# EAGLE board fins (EAGLE 7.3.0)
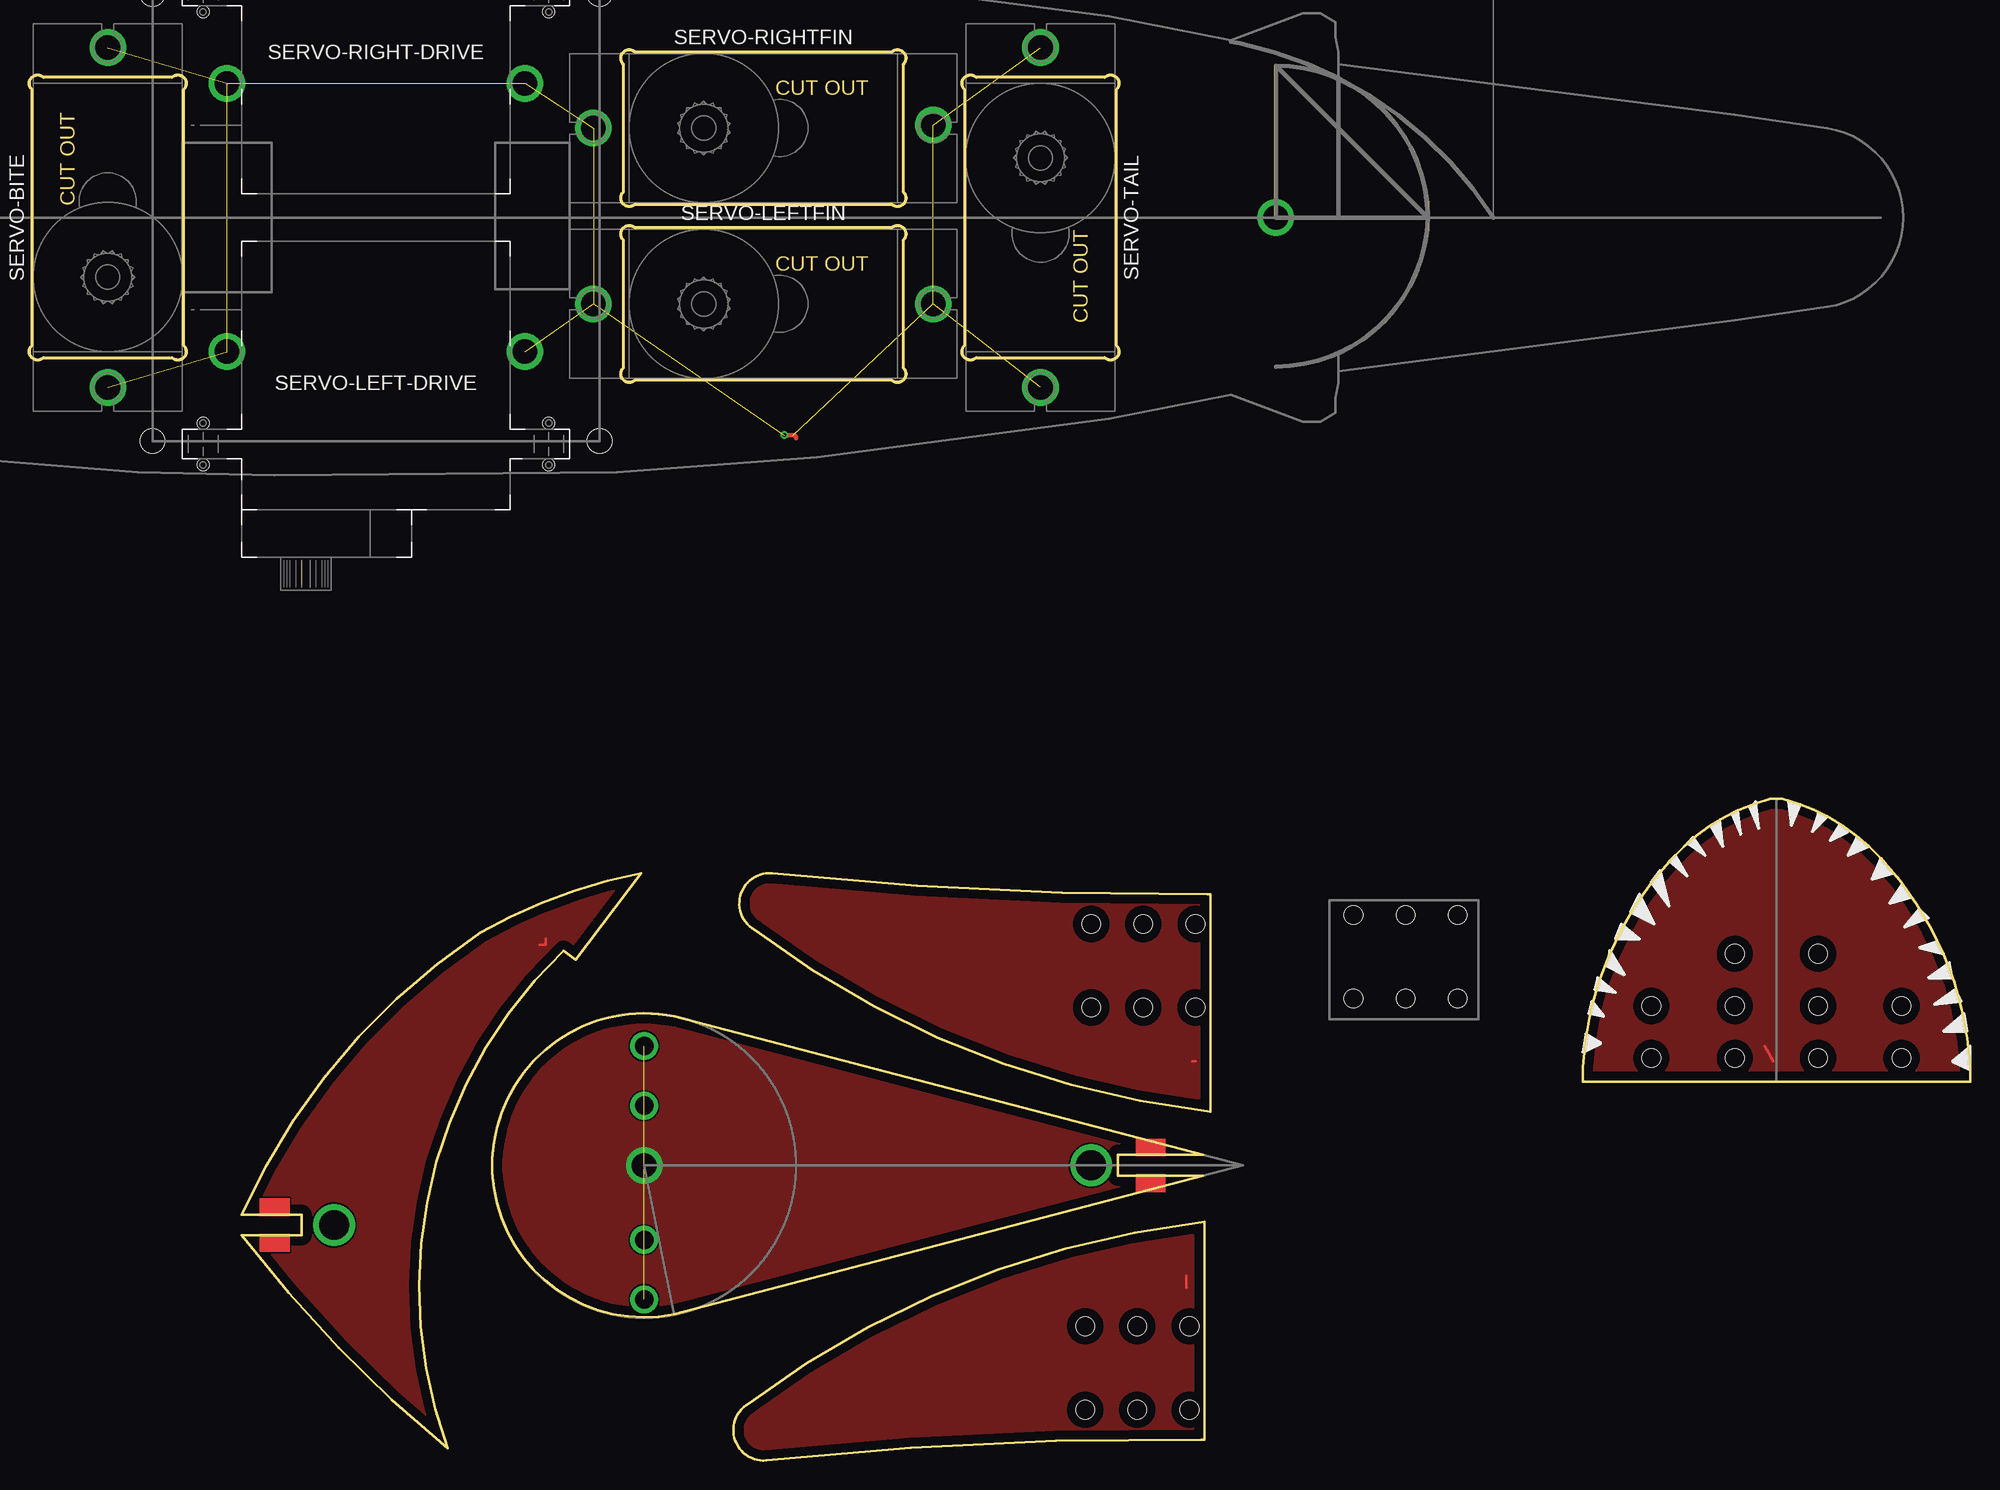
[diagram p0: board, top side]
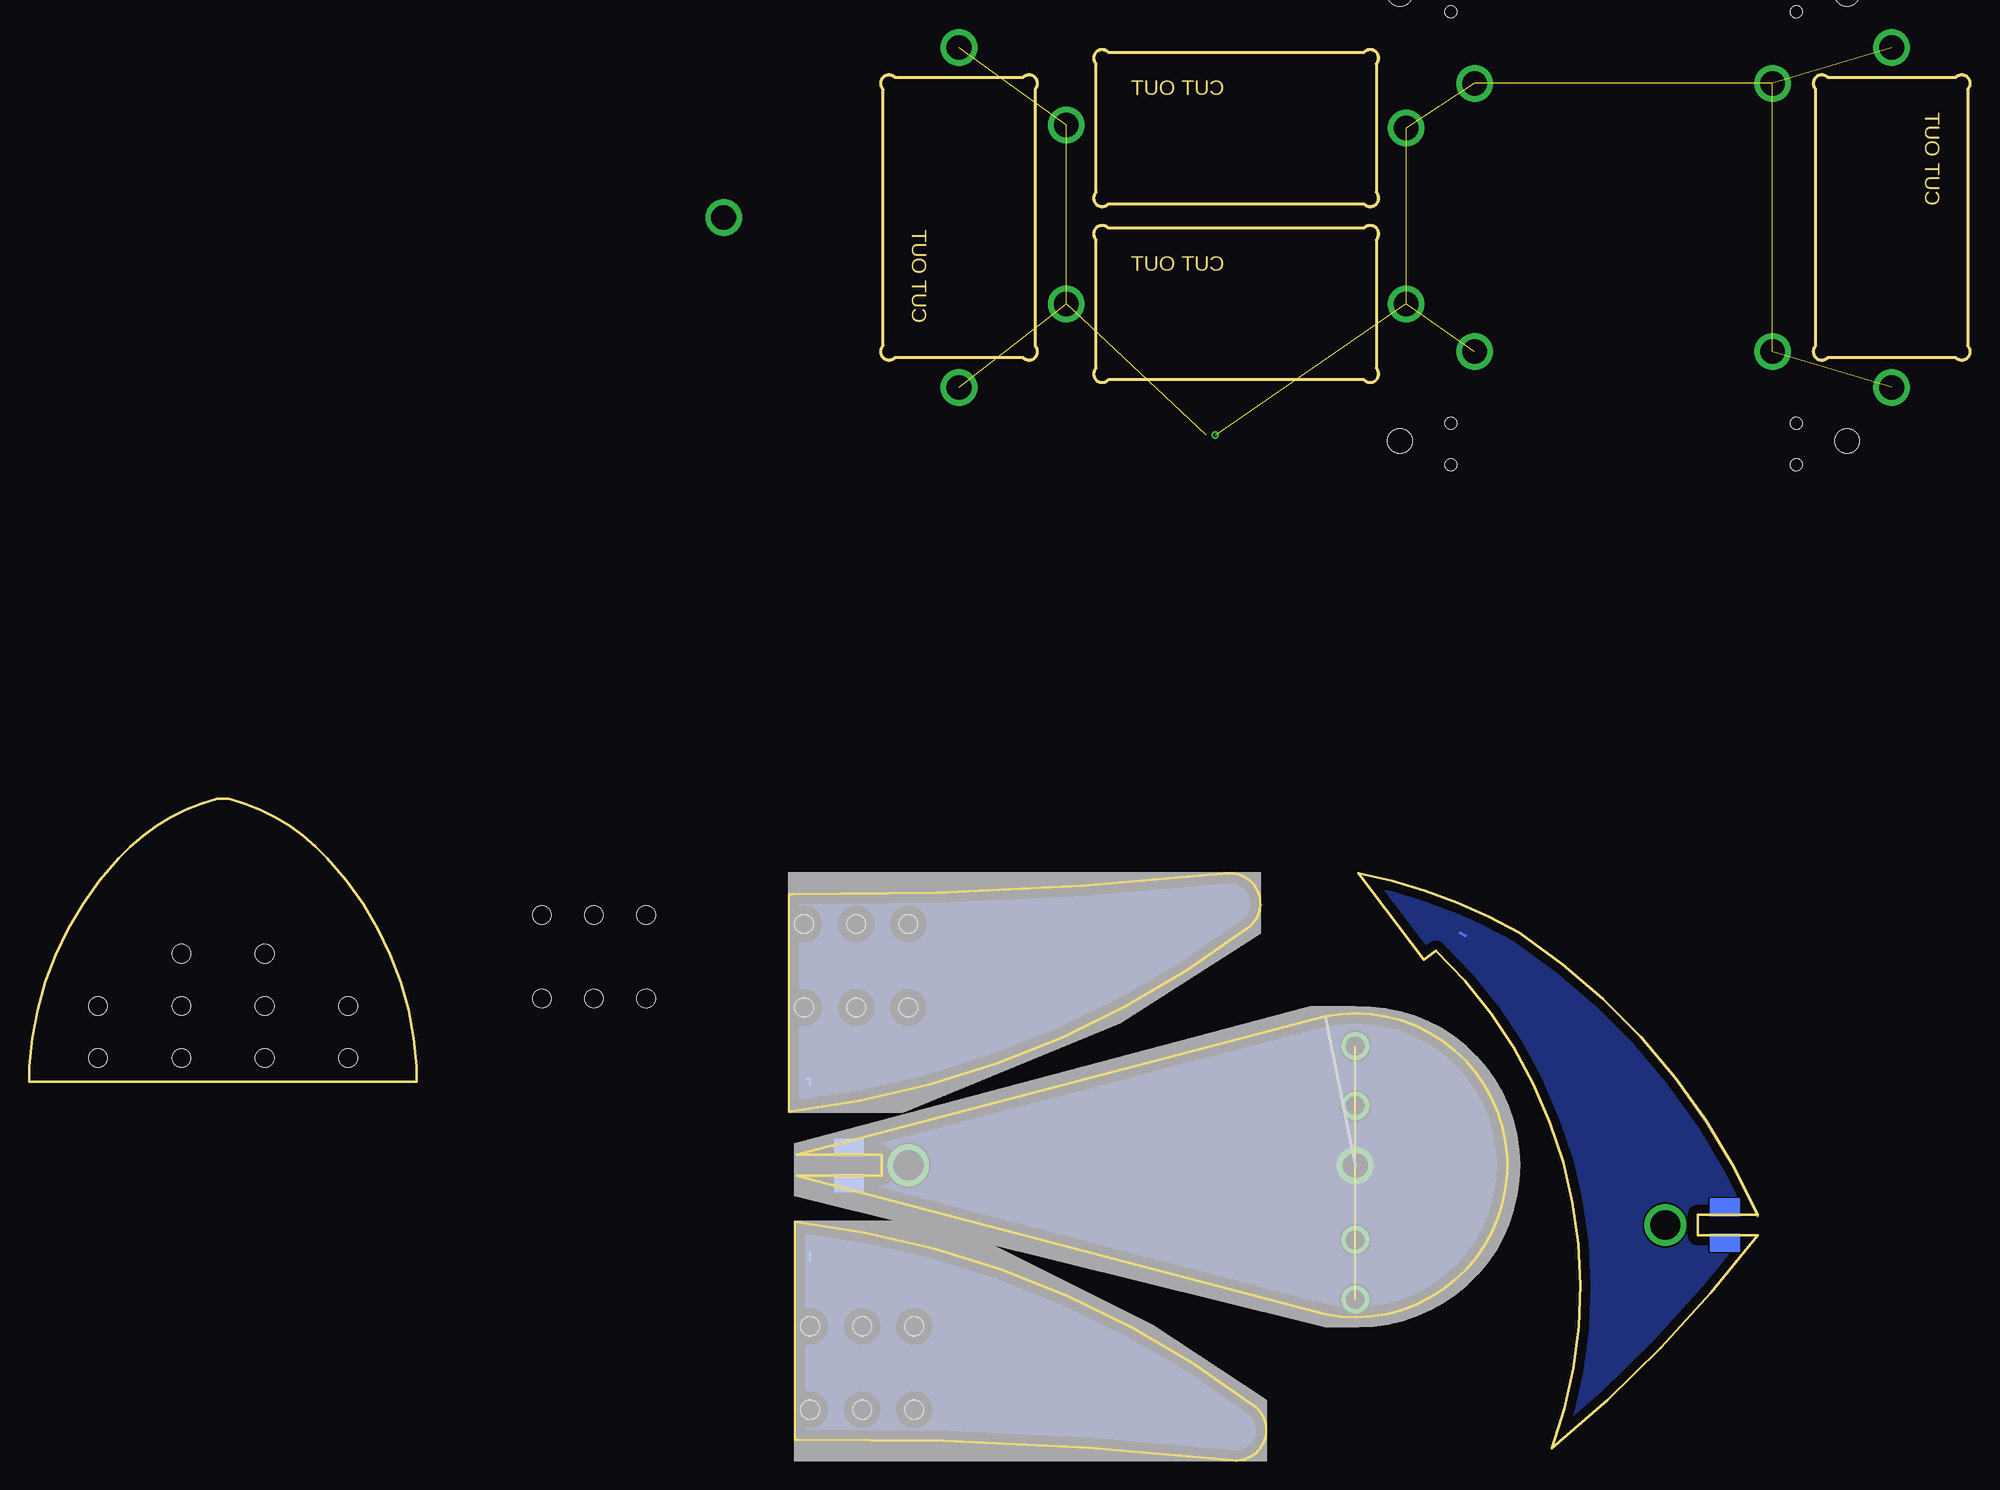
[diagram p1: board, bottom side, seen from below]

Size 165.44 x 120.23 mm. Coordinates in mm from the lower left corner, seen from the top.
Outline: 100.16,20.33 100.16,1.79 99.91,1.79 arc7 62.82,0.01 arc-155 61.3,4.84 arc-30 100.16,20.33
Outline: 100.67,29.73 100.67,48.27 100.41,48.27 arc-7 63.33,50.05 arc155 61.81,45.22 arc30 100.67,29.73
Outline: 54.95,37.86 100.06,26.04 92.79,26.04 92.79,24.27 100.06,24.27 54.95,12.46 arc-203 54.95,37.86
Outline: 52.15,50.05 46.57,42.68 45.55,43.44 arc67 35.64,1.03 arc-13 18.12,19.19 23.2,19.19 23.2,20.96 18.12,20.96 arc-32 38.44,44.97 arc-19 52.15,50.05
Outline: 132.42,32.27 165.44,32.27 165.44,33.54 arc40 157.82,51.32 arc33 149.44,56.4 148.42,56.4 arc33 140.04,51.32 arc40 132.42,33.54 132.42,32.27
Copper layers (1*16): Top 0.0356mm / dielectric 1.5011mm / Bottom 0.0356mm
Design rules "LaenPCBOrder-tented *": minimum track width 6mil, minimum drill 13mil, track to track 6mil, track to pad 6mil, pad to pad 6mil, via to via 6mil, smd to smd 0mil, copper to edge 30mil, drill to drill 6mil, minimum pad ring 7mil, minimum via ring 7mil, stop-mask expansion 4mil, vias tented up to drill 25mil, thermal gap 10mil
Holes 2.1 mm at 10.5,124.98 48.6,124.98 48.6,86.88 10.5,86.88
Holes 1.02 mm at 14.82,84.85 44.28,84.85 44.28,88.4 14.82,88.4 14.82,123.45 14.82,127.01 44.28,123.45 44.28,127.01
Holes 1.57 mm at 98.89,4.33 90,4.33 94.44,4.33 98.89,11.44 90,11.44 94.44,11.44 99.4,45.73 90.51,45.73 94.95,45.73 99.4,38.62 90.51,38.62 94.95,38.62 121.75,46.49 112.86,46.49 117.3,46.49 121.75,39.38 112.86,39.38 117.3,39.38 145.37,43.19 145.37,34.3 145.37,38.74 152.48,43.19 152.48,34.3 152.48,38.74 159.6,34.3 159.6,38.74 138.26,34.3 138.26,38.74

## Placement (x,y rotation side)
SERVO-BITE  [MICROSERVER-VERTICAL]  13.04,94.5 90 top
SERVO-LEFT-DRIVE  RIGHT-DRIVE-SERVO  [MICROSERVO-HORIZONTAL-FLIPPED]  40.98,103.9 180 top
SERVO-LEFTFIN  [MICROSERVER-VERTICAL]  51.14,92.21 0 top
SERVO-RIGHT-DRIVE  [MICROSERVO-HORIZONTAL]  18.12,107.96 0 top
SERVO-RIGHTFIN  [MICROSERVER-VERTICAL]  51.14,107.2 0 top
SERVO-TAIL  [MICROSERVER-VERTICAL]  79.84,117.36 270 top

## Library data of the parts
SERVO-BITE SERVO-LEFT-DRIVE SERVO-LEFTFIN SERVO-RIGHT-DRIVE SERVO-RIGHTFIN SERVO-TAIL = tekdemo

## Tracks (layer width: path | path; a pad name or v marks a point on that pad's centre or on a via)
BITET
  Top 0.203: 148.67,34.05 147.91,35.32
  pour Top: 132.42,32.27 132.42,39.89 140.04,52.59 148.93,56.4 157.82,52.59 164.17,41.16 165.44,32.27
GND  (via drill 0.3, 2.1)  (12 unrouted)
  Top 0.381: v64.35,87.39 65.11,87.39 arc-90 65.36,87.13
  other vias: 86.19,91.45 77.05,98.56 77.05,113.8 86.19,120.41 48.09,113.55 48.09,98.56 6.69,91.45 6.69,120.41 16.85,94.5 42.25,94.5 42.25,117.36 16.85,117.36
LFIN
  Top 0.203: 98.64,14.74 98.64,15.76
  pour Top: 60.03,0.01 60.03,5.09 87.46,20.33 100.16,20.33 100.16,0.01
LFINB
  Bottom 0.203: 98.89,17.79 98.89,17.03
  pour Bottom: 60.03,0.01 60.03,5.09 87.46,20.33 100.16,20.33 100.16,0.01
N$1  (via drill 2.1)
  other vias: 106.26,105.93
N$5  (via drill 1.57)  (3 unrouted)
  other vias: 52.41,18.81 52.41,13.73 52.41,30.24 52.41,35.32
N$7  (via drill 2.54)
  other vias: 90.51,25.16
N$8  (via drill 2.54)
  other vias: 25.99,20.08
RFIN
  Top 0.203: 99.4,34.05 99.14,34.05
  pour Top: 100.67,50.05 100.67,29.73 90.76,29.73 60.54,44.97 60.54,50.05
RFINB
  Bottom 0.203: 98.89,32.01 98.89,32.52 99.14,32.52
  pour Bottom: 100.67,29.73 100.67,50.05 60.54,50.05 60.54,44.97 90.76,29.73
TFIN2  (via drill 2.1)
  other vias: 52.41,25.16
  pour Bottom: 38.44,38.62 38.44,12.2 59.01,12.2 100.67,22.87 100.67,26.93 56.22,38.62
  pour Top: 38.44,12.2 38.44,38.62 56.22,38.62 100.67,26.93 100.67,22.87 59.01,12.2
TFIN-B
  Top 0.203: 44.03,44.46 44.03,43.95 43.52,43.95
  pour Top: 52.15,50.05 36.15,25.92 36.41,0.52 34.88,0.52 18.37,15.76 18.12,27.19 35.14,43.7 47.58,50.05
TFIN-T
  Bottom 0.203: 43.52,44.97 43.01,44.71
  pour Bottom: 52.15,50.05 36.15,25.92 36.41,0.52 34.88,0.52 18.37,15.76 18.12,27.19 35.14,43.7 47.58,50.05
(copper drawn outside any net)
  shapes: Bottom area x4, Top area x4

## Text on the board
tDocu: + S - | CUT OUT | CUT OUT | + S -